# Altium PCB PCB1.PcbDoc
Units mm, origin at the board's own origin, x right, y up, seen from the top; angles counter-clockwise.
Board outline 14.61 x 28.09 mm, 2 copper layers (Top Layer, Bottom Layer); 1 components, 4 nets, 11 pads, 4 vias.
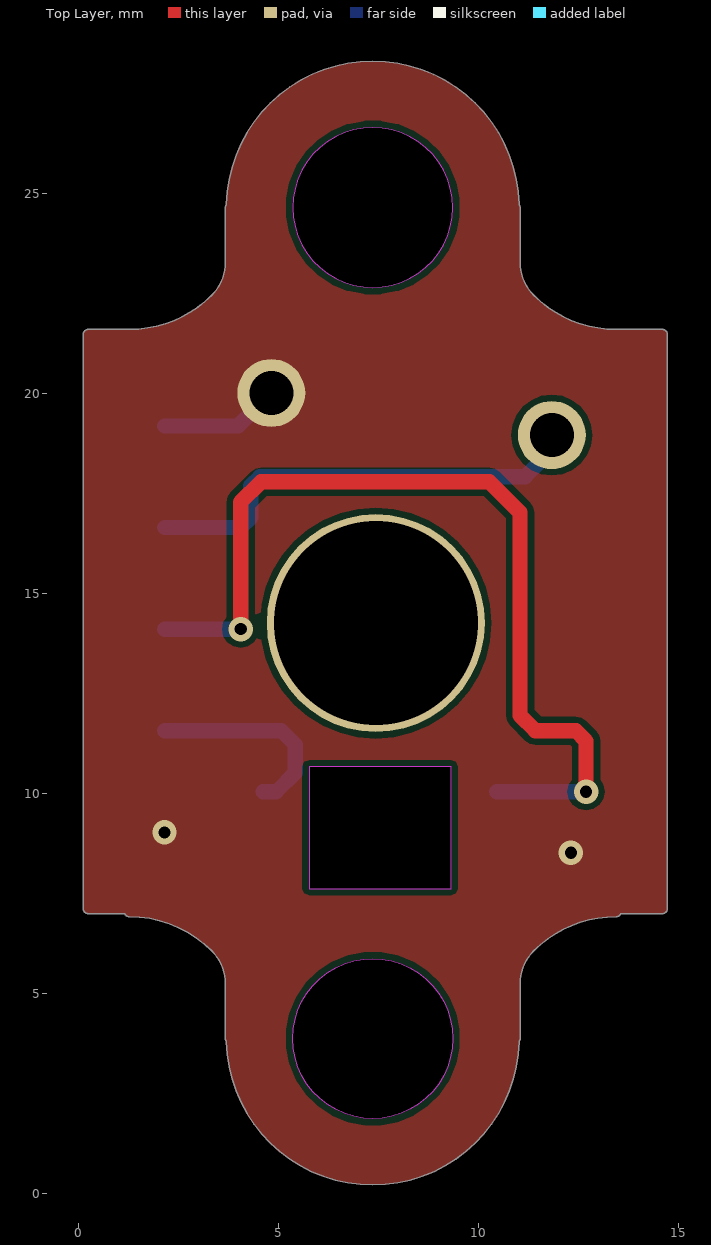
[diagram p0: Top Layer view]
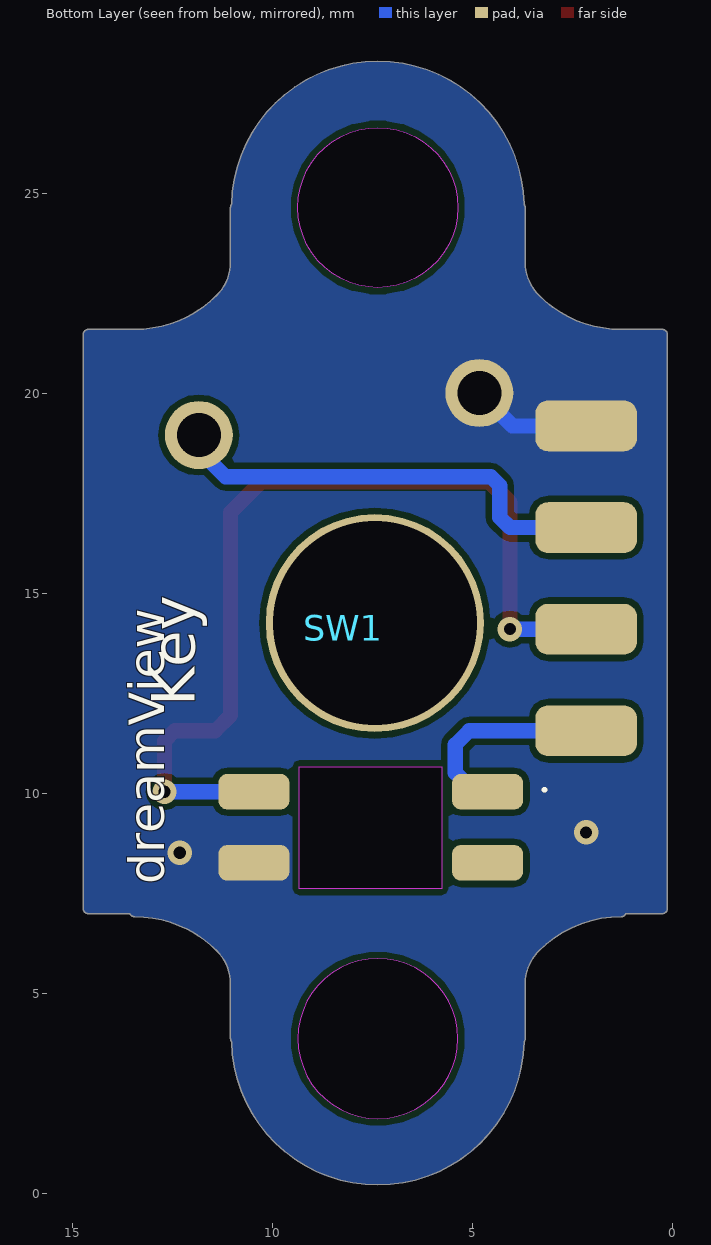
[diagram p1: Bottom Layer view, seen from below]

## Layer stack, top to bottom
Top Solder: solder mask 0.0102, Solder Resist, Dk 3.5
Top Layer: signal copper 0.0356
Dielectric 1: dielectric 0.32, FR-4, Dk 4.8
Bottom Layer: signal copper 0.0356
Bottom Solder: solder mask 0.0102, Solder Resist, Dk 3.5

## Board outline
1.166,6.985 ccw(c1.283,7.035) 1.283,6.908 cw(c1.283,4) 3.339,6.056 cw(c2.509,5.227) 3.339,6.056 cw(c2.509,5.227) 3.683,5.227 3.683,3.86 ccw(c3.81,3.86) 3.708,3.784 ccw(c7.366,3.86) 11.024,3.784 ccw(c10.922,3.86) 11.049,3.86 11.049,5.227 cw(c12.223,5.227) 11.393,6.056 cw(c12.223,5.227) 11.393,6.056 cw(c13.449,4) 13.449,6.908 ccw(c13.449,7.035) 13.566,6.985 14.605,6.985 ccw(c14.605,7.112) 14.732,7.112 14.732,21.463 ccw(c14.605,21.463) 14.605,21.59 13.449,21.59 cw(c13.449,24.498) 11.393,22.442 cw(c12.223,23.272) 11.393,22.443 cw(c12.223,23.272) 11.049,23.272 11.049,24.638 ccw(c10.922,24.638) 11.024,24.715 ccw(c7.366,24.638) 3.708,24.715 ccw(c3.81,24.638) 3.683,24.638 3.683,23.272 cw(c2.509,23.272) 3.339,22.443 cw(c2.509,23.272) 3.339,22.442 cw(c3.429,22.352) 3.339,22.443 3.339,22.442 cw(c1.283,24.498) 1.283,21.59 0.254,21.59 ccw(c0.254,21.463) 0.127,21.463 0.127,7.112 ccw(c0.254,7.112) 0.254,6.985
cut-out: 5.366,3.86 cw(c7.366,3.86) 7.366,5.86 cw(c7.366,3.86) 9.366,3.86 cw(c7.366,3.86) 7.366,1.86 cw(c7.366,3.86)
cut-out: 5.366,24.638 ccw(c7.366,24.638) 7.366,22.638 ccw(c7.366,24.638) 9.366,24.638 ccw(c7.366,24.638) 7.366,26.638 ccw(c7.366,24.638)

## Design rules (kind name [scope] priority, off if disabled: settings)
Clearance [All] p1: gap=0.152 ignorepadtopadclearanceinfootprint=FALSE
ComponentClearance [All] p1 off: gap=0.254 collisioncheckmode=3 verticalgap=0.254 showdistances=FALSE
HoleSize [All] p1: absolutevalues=TRUE maxlimit=6.3 minlimit=0.2 maxpercent=80.000 minpercent=20.000
HoleToHoleClearance [All] p1: gap=0.152 allowstackedmicrovias=TRUE
MinimumSolderMaskSliver [All] p1: minsoldermaskwidth=0.152
PlaneConnect [All] p1: planeconnectstyle=Direct reliefexpansion=0.508 reliefentries=4 reliefconductorwidth=0.254 reliefairgap=0.254
PolygonConnect [All] p1: connectstyle=Direct reliefconductorwidth=0.254 reliefentries=4 polygonreliefangle="90 Angle" airgapwidth=0.254
RoutingVias [All] p1: holewidth=0.3 width=0.45 viastyle="Through Hole" minholewidth=0.3 minwidth=0.45 maxholewidth=6 maxwidth=10
SilkToSilkClearance [All] p1: silktosilkclearance=0
SilkToSolderMaskClearance [IsPad] p1: minsilkscreentomaskgap=0 clearancetoexposedcopper=FALSE
SolderMaskExpansion [All] p1: expansion=0.102
UnRoutedNet [All] p1: checkbadconnections=TRUE
Width [All] p1: maxlimit=2.54 minlimit=0.127 preferedwidth=0.203 minimp=50.000000 maximp=50.000000 favimp=50.000000
22 further rules are at their usual default settings.

## Components (designator, comment, footprint, x,y, rotation, side; value= is the part's Value field where it differs from the comment)
SW1 "佳达隆带灯热插拔矮轴" Gateron_Switch_Direct 7.518,14.401 r180 top

## Footprints (in the part's own frame and the unit in brackets; to place one, negate y for a bottom-side part, rotate by r counter-clockwise, add the part's x,y. Pads: shape width x height; smd on the part's side, far side on the other; paste and mask are expansions set on the pad)
Gateron_Switch_Direct [mil]
  rrect50% 70x35 smd far side paste+0 mask+4: 1(114,172) 2(114,242) 3(-116,242) 4(-116,172)
  round 66.93 hole 43.31 paste+0 mask+2: 5(105.87,-220.44) 6(-170.22,-179.05)
  round 214.57 hole 200.79 copper offset -0.01,-0.01 paste+0 mask+4.02: NC(2.99,5.99)
  Keep-Out Layer board cut-out: 68.72,267.28 -71.28,267.28 -71.28,147.28 68.72,147.28 68.72,267.28

## Part data
SW1: library part Gateron_Switch_Low, Add into BOM=yes, Convert to PCB=yes, Device=带灯热插拔矮轴, Symbol=带灯热插拔矮轴

## Free pads (board coordinates)
  rrect50% 2.54x1.27 smd far side: 1(2.159,11.557) 2(2.159,14.097) 3(2.159,16.637) 4(2.159,19.177)

## Via types
v1: diameter 0.61, hole 0.305, Top Layer to Bottom Layer, tented both sides, 4 vias

## Nets (pads, with @x,y where several pads share a name; then routed paths per layer and width w, separated by ;. In a path a pad name is that pad's centre, name@x,y a point inside that pad or via, vN(x,y) a via of type N, cw(c..) or ccw(c..) an arc to the next point about the centre after c; other vN are vias at no path point)
+3.3: pad.1 SW1.1 | length 5.1
  Bottom Layer w0.381: pad.1 5.08,11.557 5.43,11.207 5.43,10.51 4.953,10.033 SW1.1
GND: pad.4 SW1.3 SW1.5 | length 3
  Bottom Layer w0.381: pad.4 4.001,19.177 4.824,20.001 SW1.5
  other v1: 12.319,8.509 2.159,9.017
NetCN1_2: pad.3 SW1.6 | length 11.3
  Bottom Layer w0.381: pad.3 4.064,16.637 4.318,16.891 4.318,17.684 4.541,17.907 11.176,17.907 11.842,18.573 SW1.6
NetCN1_3: pad.2 SW1.4 | length 23.1
  Top Layer w0.381: v1(4.064,14.097) 4.064,17.272 4.572,17.78 10.287,17.78 11.049,17.018 11.049,11.938 11.43,11.557 12.446,11.557 12.7,11.303 v1(12.7,10.033)
  Bottom Layer w0.381: pad.2 v1(4.064,14.097) ; SW1.4 v1(12.7,10.033)
pads on no net: SW1.2 SW1.NC

## Polygon pours and split planes (outlines as drawn)
GND on Top Layer (solid, remove dead copper, pour order 6): 1.166,6.985 ccw(c1.283,7.035) 1.283,6.908 cw(c1.283,4) 3.339,6.056 cw(c2.509,5.227) 3.339,6.056 cw(c2.509,5.227) 3.683,5.227 3.683,3.86 ccw(c3.81,3.86) 3.708,3.784 ccw(c7.366,3.86) 11.024,3.784 ccw(c10.922,3.86) 11.049,3.86 11.049,5.227 cw(c12.223,5.227) 11.393,6.056 cw(c12.223,5.227) 11.393,6.056 cw(c13.449,4) 13.449,6.908 ccw(c13.449,7.035) 13.566,6.985 14.605,6.985 ccw(c14.605,7.112) 14.732,7.112 14.732,21.463 ccw(c14.605,21.463) 14.605,21.59 13.449,21.59 cw(c13.449,24.498) 11.393,22.442 cw(c12.223,23.272) 11.393,22.443 cw(c12.223,23.272) 11.049,23.272 11.049,24.638 ccw(c10.922,24.638) 11.024,24.715 ccw(c7.366,24.638) 3.708,24.715 ccw(c3.81,24.638) 3.683,24.638 3.683,23.272 cw(c2.509,23.272) 3.339,22.443 cw(c2.509,23.272) 3.339,22.442 cw(c3.429,22.352) 3.339,22.443 3.339,22.442 cw(c1.283,24.498) 1.283,21.59 0.254,21.59 ccw(c0.254,21.463) 0.127,21.463 0.127,7.112 ccw(c0.254,7.112) 0.254,6.985
GND on Bottom Layer (solid, remove dead copper, pour order 8): 1.166,6.985 ccw(c1.283,7.035) 1.283,6.908 cw(c1.283,4) 3.339,6.056 cw(c2.509,5.227) 3.339,6.056 cw(c2.509,5.227) 3.683,5.227 3.683,3.86 ccw(c3.81,3.86) 3.708,3.784 ccw(c7.366,3.86) 11.024,3.784 ccw(c10.922,3.86) 11.049,3.86 11.049,5.227 cw(c12.223,5.227) 11.393,6.056 cw(c12.223,5.227) 11.393,6.056 cw(c13.449,4) 13.449,6.908 ccw(c13.449,7.035) 13.566,6.985 14.605,6.985 ccw(c14.605,7.112) 14.732,7.112 14.732,21.463 ccw(c14.605,21.463) 14.605,21.59 13.449,21.59 cw(c13.449,24.498) 11.393,22.442 cw(c12.223,23.272) 11.393,22.443 cw(c12.223,23.272) 11.049,23.272 11.049,24.638 ccw(c10.922,24.638) 11.024,24.715 ccw(c7.366,24.638) 3.708,24.715 ccw(c3.81,24.638) 3.683,24.638 3.683,23.272 cw(c2.509,23.272) 3.339,22.443 cw(c2.509,23.272) 3.339,22.442 cw(c3.429,22.352) 3.339,22.443 3.339,22.442 cw(c1.283,24.498) 1.283,21.59 0.254,21.59 ccw(c0.254,21.463) 0.127,21.463 0.127,7.112 ccw(c0.254,7.112) 0.254,6.985

## Silkscreen, mask and mechanical layers (free items; w line width, h text height)
Bottom Overlay:
  text "Key" at 11.575,12.164 h1.85 r270
  text "dreamView" at 12.41,7.715 h1.52 r270
Mechanical 1:
  lines w0.254: 1.283,7.035 cw(c1.283,4) 3.429,6.146 cw(c2.509,5.227) 3.81,5.227 3.81,3.86 ; 1.283,7.112 0.254,7.112 0.254,21.463 1.778,21.463 ; 1.283,21.463 ccw(c1.283,24.498) 3.429,22.352 ccw(c2.509,23.272) 3.81,23.272 3.81,24.638 ; 3.844,4.117 ccw(c7.366,3.86) 10.89,4.086 ; 3.854,24.268 cw(c7.366,24.638) 10.889,24.403 ; 10.922,3.86 10.922,5.227 cw(c12.223,5.227) 11.303,6.146 cw(c13.449,4) 13.449,7.035 ; 10.922,24.638 10.922,23.272 ccw(c12.223,23.272) 11.303,22.352 ccw(c13.449,24.498) 13.449,21.463 ; 13.081,21.463 14.605,21.463 14.605,7.112 13.449,7.112
Drill Drawing:
  text ".legend" at -1.194,30.861 h1.52